# Altium PCB 06002480宁波2号线二期车载PIS系统_功率放大器音频板2 BHC-A-2030-05_PCB V1.0.PcbDoc (part 5 of 6)
Units mil, origin at the board's own origin, x right, y up, seen from the top; angles counter-clockwise.
Board outline 3385.83 x 3779.53 mil, 4 copper layers (Top Layer, GND, VDD, Bottom Layer); 210 components, 185 nets, 792 pads, 313 vias.
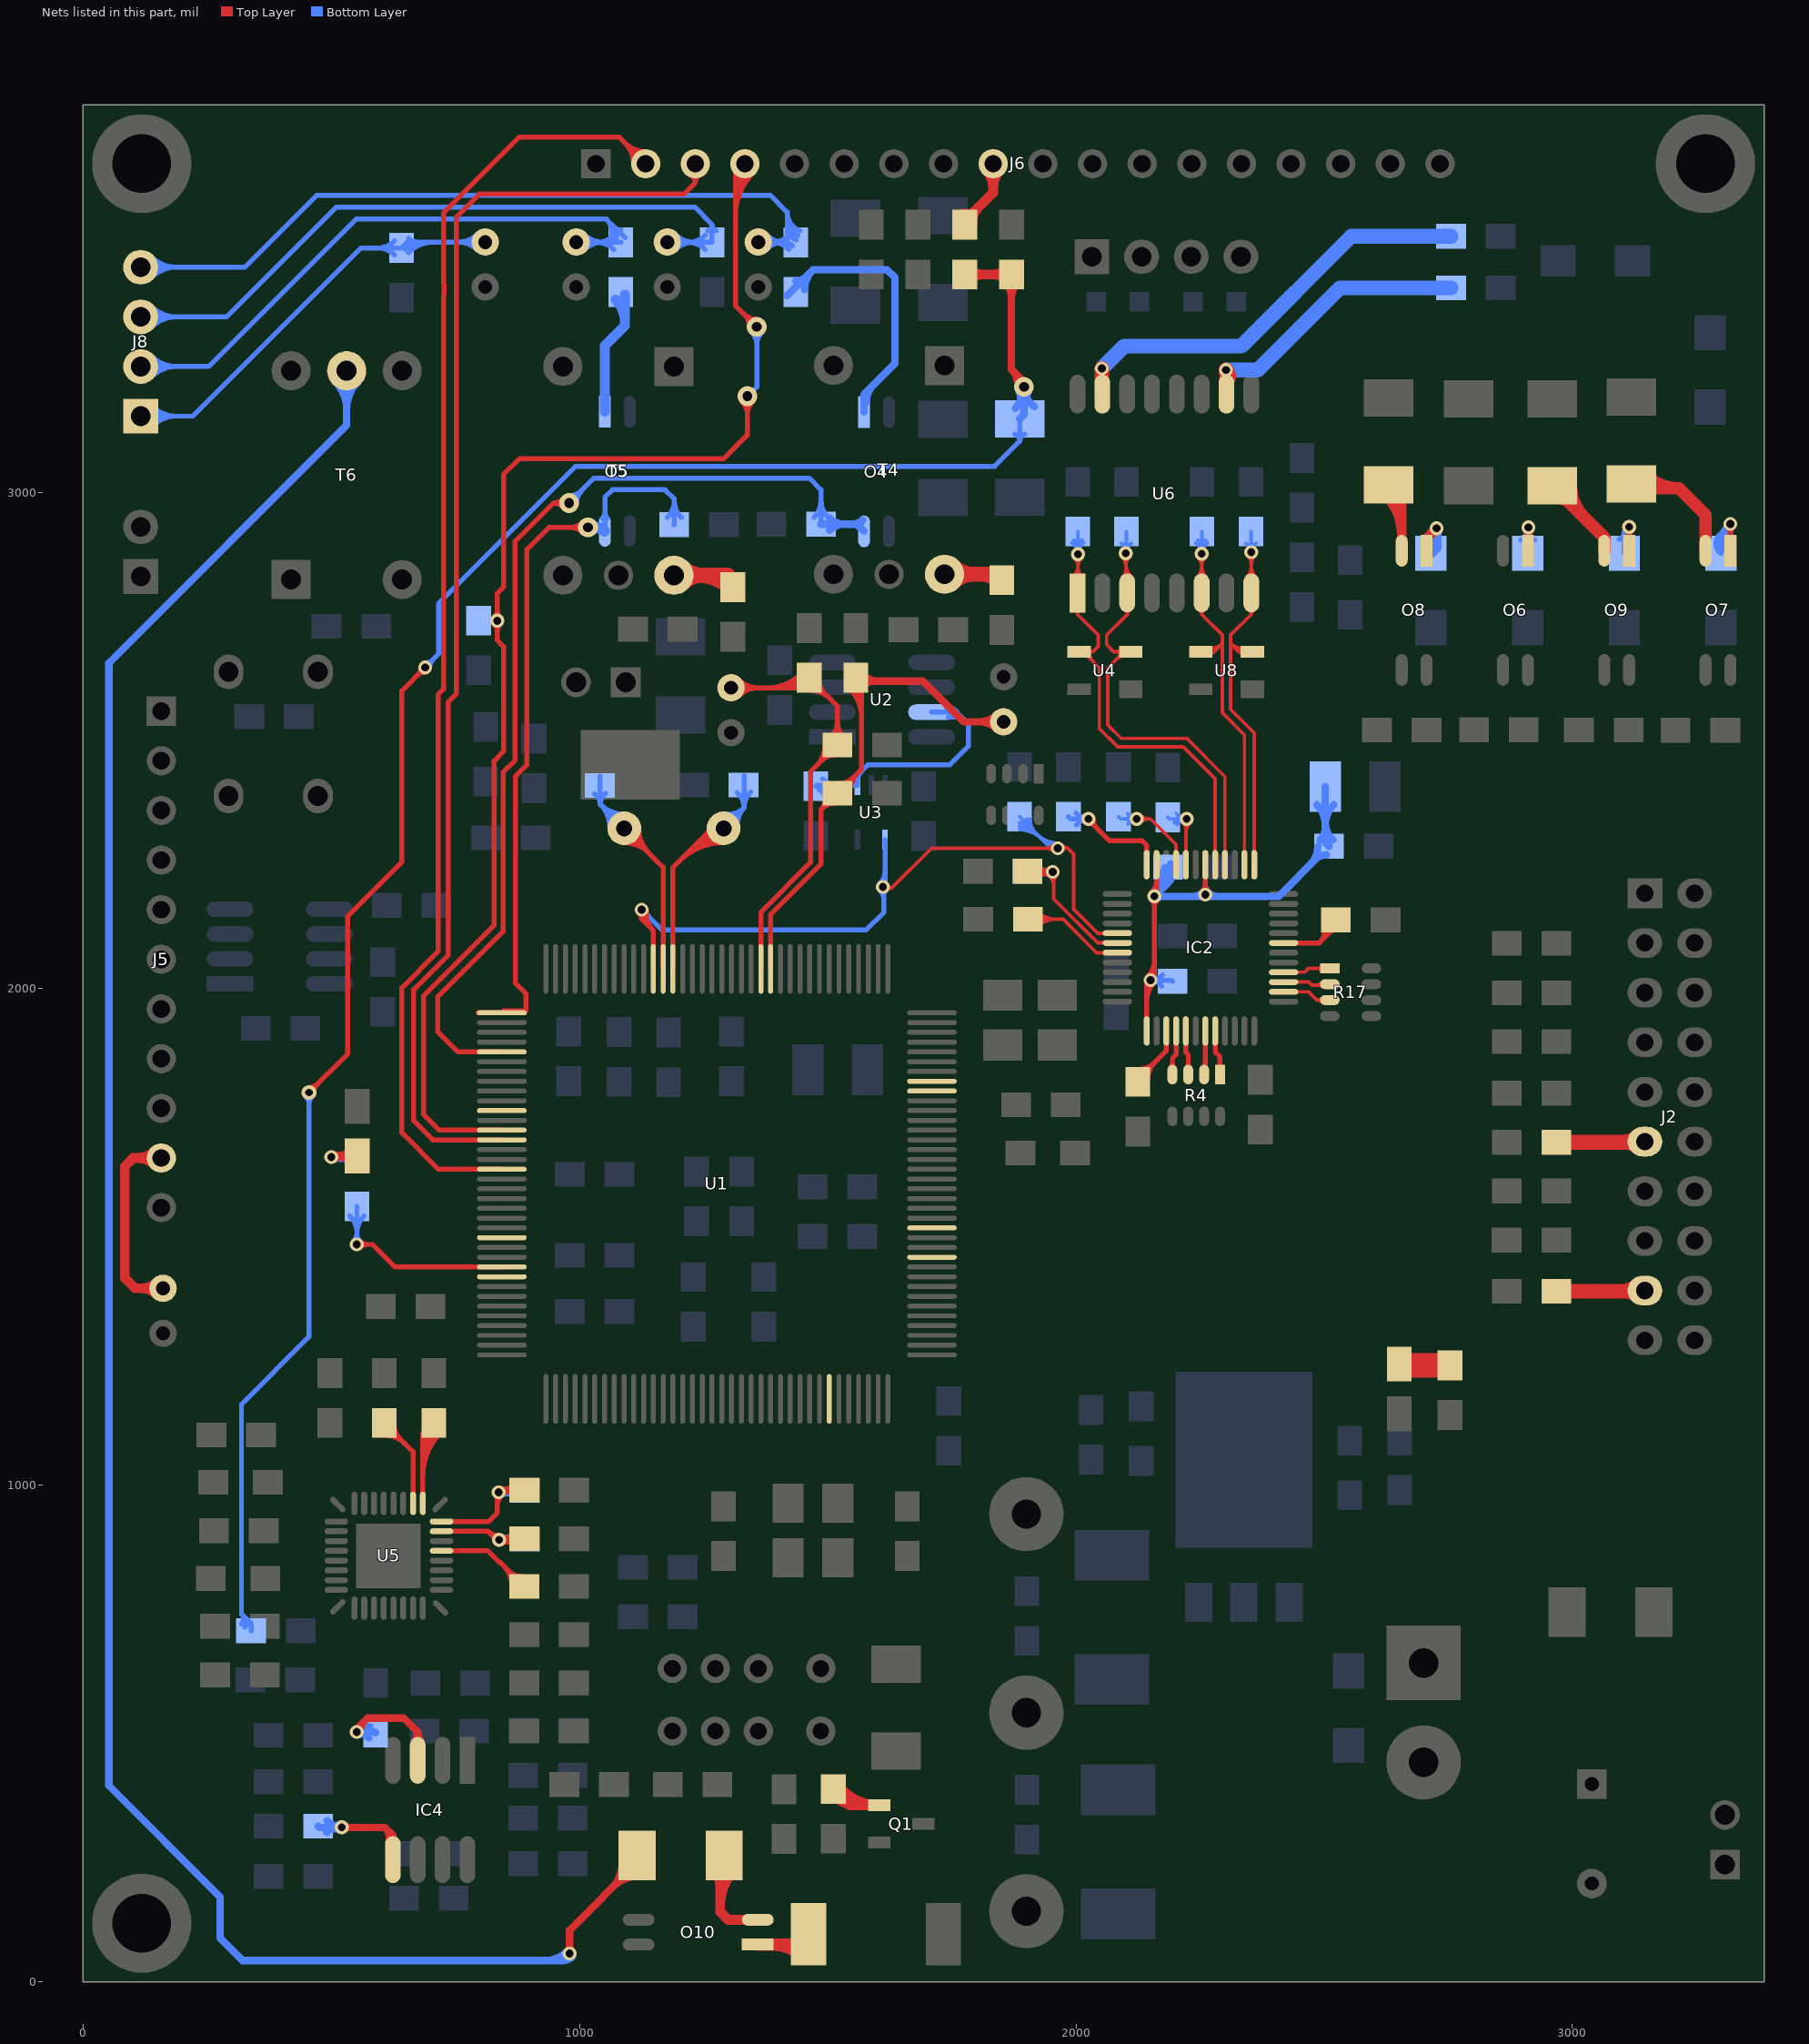
[diagram p7: the nets of this part, all layers, seen from the top]

## Via types
v1: diameter 28, hole 16, Top Layer to Bottom Layer, 240 vias
v2: diameter 30, hole 15, Top Layer to Bottom Layer, 25 vias
v3: diameter 35, hole 15, Top Layer to Bottom Layer, 16 vias
v4: diameter 30, hole 18, Top Layer to Bottom Layer, 10 vias
v5: diameter 40, hole 20, Top Layer to Bottom Layer, 9 vias
v6: diameter 50, hole 25, Top Layer to Bottom Layer, 7 vias
v7: diameter 50, hole 28, Top Layer to Bottom Layer, 5 vias
v8: diameter 36, hole 20, Top Layer to Bottom Layer, 1 vias

## Nets (pads, with @x,y where several pads share a name; then routed paths per layer and width w, separated by ;. In a path a pad name is that pad's centre, name@x,y a point inside that pad or via, vN(x,y) a via of type N, cw(c..) or ccw(c..) an arc to the next point about the centre after c; other vN are vias at no path point) (continued)
NetD15_A: D15.A O7.2 | length 342.3
  Top Layer w25: D15.A@3118.5,3016.75 3127.5,3007.75 3214.25,3007.75 3268,2954 O7.2@3268,2882 ; D15.A@3148.68,2999.07 cw(c3169.63,2978.12) 3169.63,3007.75 ; D15.A@3148.68,3034.43 ccw(c3213.09,3098.84) 3213.09,3007.75
NetD16_A: D16.A O8.2 | length 285.2
  Top Layer w20: D16.A@2622.56,2995.31 cw(c2541.82,2914.57) 2656,2914.57 ; D16.A@2629.5,3014.75 2656,2988.26 O8.2@2656,2882 ; D16.A@2636.7,3009.45 cw(c2590.11,2962.86) 2656,2962.86
NetD17_A: D17.A O9.2 | length 268.8
  Top Layer w25: D17.A@2959.5,3012.75 3064,2908.26 O9.2@3064,2882 ; D17.A@2972,2987.75 cw(c2972,2957.57) D17.A@2993.34,2978.91 ; D17.A@2997,3012.75 ccw(c3087.54,3012.75) 3023.52,2948.74
NetD19_A: D19.A O10.2 | length 340.2
  Top Layer w20: D19.A@1271.8,222.56 cw(c1244.77,195.53) 1283,195.53 ; 1283,155.7 cw(c1377.55,155.7) D19.A@1310.69,222.56 ; 1283,203.99 cw(c1329.27,203.99) D19.A@1296.55,236.7 ; D19.A@1291.25,254.5 1283,246.26 1283,141 1299,125 O10.2@1359,125
NetD19_K: D19.K T6.4 | length 4856.3
  Top Layer w15: v1@975.4,61.6 ccw(c964.31,72.69) 980,72.69 ccw(c995.69,72.69) v1@984.6,61.6 ; v1(980,57) 980,104 1116.25,240.25 D19.K@1116.25,254.5 ; 1063.79,187.79 ccw(c1009.58,242) D19.K@1086.25,242 ; 1068.03,192.03 cw(c1116.25,143.82) D19.K@1116.25,212 ; D19.K@1089.4,213.4 ccw(c1060.8,242) D19.K@1101.25,242
  Bottom Layer w15: T6.4@508.28,3221.94 cw(c453.87,3167.53) 530.81,3167.53 cw(c607.75,3167.53) T6.4@553.35,3221.94 ; T6.4@518.88,3232.54 cw(c490.08,3203.74) 530.81,3203.74 cw(c571.54,3203.74) T6.4@542.74,3232.54 ; T6.4@530.81,3244.47 530.81,3134.81 52,2656 52,395 276,171 276,88 321,43 966,43 v1(980,57) ; 930.51,43 ccw(c930.51,106.49) v1@975.4,61.6 ; 966.72,43 ccw(c966.72,70.28) v1@986.01,50.99
NetIC2_2: IC2.2 R17.3 | length 124.6
  Top Layer w7: IC2.2@2418,1993.68 2468.52,1993.68 2485.2,1977 R17.3@2511,1977 ; R17.3@2496.72,1972.4 ccw(c2485.62,1961.31) 2485.62,1977 ccw(c2485.62,1992.69) R17.3@2496.72,1981.6
NetIC2_3: IC2.3 R17.2 | length 121.1
  Top Layer w7: IC2.3@2418,2013.37 2468.63,2013.37 2475,2007 2509,2007 R17.2@2511,2009 ; 2480.79,2007 ccw(c2480.79,2029.52) R17.2@2496.72,2013.6 ; 2490.45,2007 cw(c2490.45,1998.14) R17.2@2496.72,2004.4
NetIC2_4: IC2.4 R17.1 | length 120.9
  Top Layer w7: IC2.4@2418,2033.05 2460.05,2033.05 2468,2041 R17.1@2511,2041 ; R17.1@2496.72,2036.4 ccw(c2485.62,2025.31) 2485.62,2041 ccw(c2485.62,2056.69) R17.1@2496.72,2045.6
NetIC2_7: IC2.7 R21.1 | length 213.4
  Top Layer w10: IC2.7@2418,2092.11 2490.11,2092.11 ; R21.1@2499.4,2132.16 cw(c2462.64,2119.58) 2490.11,2092.11 ; 2501.45,2103.45 ccw(c2479.54,2125.37) R21.1@2508.86,2135.39 ; R21.1@2513,2146 2513,2115 2490.11,2092.11
NetIC2_20: IC2.20 R34.1 | length 289.8
  Top Layer w7: v1@2215.58,2334.58 cw(c2202.12,2321.12) 2221.15,2321.12 ; IC2.20@2221.15,2249.59 2221.15,2340.15 v1(2223,2342) ; 2221.15,2312.18 cw(c2252.82,2312.18) v1@2230.42,2334.58
  Bottom Layer w7: R34.1@2184.63,2345.32 2187.95,2342 v1(2223,2342) ; R34.1@2197.46,2333.58 cw(c2211.41,2326.25) v1@2211.41,2342 ; R34.1@2202.17,2352.76 ccw(c2223,2367.54) v1(2223,2342) ; R34.1@2203.66,2330.32 cw(c2223,2320.15) v1(2223,2342) ; v1@2213,2338.81 ccw(c2209.5,2337.69) 2208.55,2341.23 ccw(c2206.84,2347.62) v1@2213.08,2345.45 ; v1@2215.58,2334.58 ccw(c2197.65,2316.65) 2197.65,2342 ccw(c2197.65,2367.35) v1@2215.58,2349.42
NetIC2_21: IC2.21 R36.1 | length 302.3
  Top Layer w7: v1(2122,2342) 2150,2342 2201.47,2290.54 IC2.21@2201.47,2249.59 ; v1@2129.42,2334.58 cw(c2147.35,2316.65) 2147.35,2342 cw(c2147.35,2367.35) v1@2129.42,2349.42
  Bottom Layer w7: R36.1@2085.63,2346.32 2089.95,2342 v1(2122,2342) ; R36.1@2104.17,2352.21 ccw(c2122,2362.67) v1(2122,2342) ; R36.1@2104.74,2331.48 cw(c2122,2322.59) v1(2122,2342) ; v1@2114.58,2334.58 ccw(c2096.65,2316.65) 2096.65,2342 ccw(c2096.65,2367.35) v1@2114.58,2349.42
NetIC2_24: IC2.24 R35.1 | length 386.2
  Top Layer w10: v1@2025,2333 cw(c2025,2316.1) 2036.95,2328.05 ; v1(2025,2342) 2025,2340 2067,2298 2133,2298 2142.41,2288.59 IC2.24@2142.41,2249.59 ; v1@2034,2342 ccw(c2060.56,2342) 2041.78,2323.22
  Bottom Layer w10: R35.1@1984.63,2346.32 1988.95,2342 v1(2025,2342) ; R35.1@2000.21,2353.87 ccw(c2025,2373.83) v1(2025,2342) ; R35.1@2000.86,2329.64 cw(c2025,2312.25) v1(2025,2342) ; v1@2016.28,2344.24 cw(c2007.88,2346.39) 2010.13,2338.02 cw(c2012.37,2329.64) v1@2018.57,2335.7 ; v1@2016.43,2339.26 ccw(c2006.35,2336.04) 2009.09,2346.26 ccw(c2011.82,2356.48) v1@2018.94,2348.66 ; v1@2018.64,2335.64 ccw(c2003.27,2320.27) 2003.27,2342 ccw(c2003.27,2363.73) v1@2018.64,2348.36
NetIC2_30: IC2.30 R18.2 R22.1 | length 813
  Top Layer w7: R22.1@1903.32,2235.63 1903.95,2235 v1(1953,2235) ; R22.1@1918.03,2226.59 cw(c1937.12,2209.14) 1937.12,2235 ; R22.1@1918.93,2245.06 ccw(c1939.02,2260.08) v1@1939.02,2235 ; R22.1@1923.19,2221.86 cw(c1953,2194.62) v1(1953,2235) ; R22.1@1924.54,2249.25 ccw(c1953,2270.54) v1(1953,2235) ; 1932.53,2236.74 ccw(c1935.39,2247.4) v1@1944.42,2241.05 ; 1936.02,2235.8 cw(c1932.65,2223.25) v1@1943.91,2229.75 ; v1@1942.89,2232.18 ccw(c1932.41,2229.26) 1935.23,2239.76 ccw(c1938.04,2250.26) v1@1945.65,2242.5 ; v1@1943.24,2238.88 cw(c1928.78,2244.62) 1932.81,2229.59 cw(c1936.83,2214.56) v1@1946.49,2226.76 ; v1@1945.58,2242.42 cw(c1927.65,2260.35) 1927.65,2235 cw(c1927.65,2209.65) 1945.58,2227.58 cw(c1922.82,2204.82) 1955,2204.82 ; 1955,2214.48 cw(c1973.52,2214.48) v1@1960.42,2227.58 ; IC2.30@2083.36,2092.11 2043.69,2092.11 1955,2180.8 1955,2233 v1(1953,2235)
  Bottom Layer w7: R18.2@1902.68,2235.63 1903.31,2235 v1(1953,2235) ; R18.2@1918.03,2226.59 cw(c1937.12,2209.14) 1937.12,2235 ; R18.2@1918.93,2245.06 ccw(c1939.02,2260.08) v1@1939.02,2235 ; R18.2@1923.19,2221.86 cw(c1953,2194.62) v1(1953,2235) ; R18.2@1924.54,2249.25 ccw(c1953,2270.54) v1(1953,2235) ; 1932.53,2236.74 ccw(c1935.39,2247.4) v1@1944.42,2241.05 ; 1936.02,2235.8 cw(c1932.65,2223.25) v1@1943.91,2229.75 ; v1@1942.89,2232.18 ccw(c1932.41,2229.26) 1935.23,2239.76 ccw(c1938.04,2250.26) v1@1945.65,2242.5 ; v1@1943.24,2238.88 cw(c1928.78,2244.62) 1932.81,2229.59 cw(c1936.83,2214.56) v1@1946.49,2226.76 ; v1@1945.58,2227.58 ccw(c1927.65,2209.65) 1927.65,2235 ccw(c1927.65,2260.35) v1@1945.58,2242.42
NetIC2_31: IC2.31 R20.1 | length 344.9
  Top Layer w7: R20.1@1903,2140 1974,2140 2041.58,2072.43 IC2.31@2083.36,2072.43 ; R20.1@1918.25,2129.75 cw(c1943.01,2104.99) 1943.01,2140 cw(c1943.01,2175.01) R20.1@1918.25,2150.25 ; R20.1@1923.2,2124.8 cw(c1959.91,2088.09) 1959.91,2140 cw(c1959.91,2191.91) R20.1@1923.2,2155.2
NetIC2_39: IC2.39 R8.2 | length 197.2
  Top Layer w10: R8.2@2124.37,1817.37 2181.78,1874.78 IC2.39@2181.78,1914.95 ; R8.2@2124.37,1837.32 ccw(c2124.37,1885.5) 2158.43,1851.43 ; R8.2@2144.37,1817.32 cw(c2192.77,1817.32) 2158.54,1851.54
NetIC2_40: IC2.40 R4.4 | length 110
  Top Layer w10: R4.4@2190.46,1840.22 ccw(c2181.93,1848.76) 2194,1848.76 ccw(c2206.07,1848.76) R4.4@2197.54,1840.22 ; R4.4@2194,1827 2194,1860 2201.47,1867.47 IC2.40@2201.47,1914.95
NetIC2_41: IC2.41 R4.3 | length 108.9
  Top Layer w10: IC2.41@2221.15,1914.95 2221.15,1871.85 2226,1867 R4.3@2226,1827 ; R4.3@2222.46,1840.22 ccw(c2213.93,1848.76) 2226,1848.76 ccw(c2238.07,1848.76) R4.3@2229.54,1840.22
NetIC2_43: IC2.43 R4.2 | length 105.2
  Top Layer w10: R4.2@2254.46,1840.22 ccw(c2239.85,1854.84) 2260.52,1854.84 ; R4.2@2258,1827 2260.52,1829.52 IC2.43@2260.52,1914.95
NetIC2_44: IC2.44 R4.1 | length 111
  Top Layer w10: IC2.44@2280.21,1914.95 2280.21,1872.8 2290,1863 R4.1@2290,1827 ; R4.1@2286.46,1840.22 ccw(c2277.93,1848.76) 2290,1848.76 ccw(c2302.07,1848.76) R4.1@2293.54,1840.22
NetIC4_3: IC4.3 R76.2 | length 454.6
  Top Layer w15: v1(551,503) 551,509 573,531 646,531 674,503 674,494 ; v1@557.5,503 cw(c587.68,503) 566.34,524.34 ; IC4.3@668.17,483.33 ccw(c654.09,497.41) 674,497.41 ccw(c693.91,497.41) IC4.3@679.83,483.33 ; IC4.3@669.05,484.09 ccw(c661.61,494) 674,494 ; IC4.3@678.95,484.09 cw(c686.39,494) 674,494
  Top Layer w20: IC4.3@674,446 674,494
  Bottom Layer w15: v1@554.25,497.37 cw(c562.1,483.78) 566.16,498.94 cw(c570.22,514.1) v1@556.63,506.25 ; v1@554.25,508.63 ccw(c562.1,522.22) 566.16,507.06 ccw(c570.22,491.9) v1@556.63,499.75 ; v1@555.6,498.4 cw(c566.69,487.31) 566.69,503 cw(c566.69,518.69) v1@555.6,507.6 ; R76.2@575.53,490.97 ccw(c551,471.99) v1(551,503) ; R76.2@576.84,513.89 cw(c551,539.09) v1(551,503) ; R76.2@589.37,501.68 588.05,503 v1(551,503)
NetIC4_5: IC4.5 R105.2 | length 417.3
  Top Layer w15: v1(521,311) 608,311 ; v1@525.6,306.4 cw(c536.69,295.31) 536.69,311 cw(c536.69,326.69) v1@525.6,315.6 ; IC4.5@616.07,279.77 ccw(c585.54,288.54) 608,311 ; IC4.5@618.75,283.86 ccw(c609.55,295) 624,295 ; IC4.5@624,246 624,295 ; IC4.5@629.25,283.86 cw(c638.45,295) 624,295 ; 608,311 624,295
  Bottom Layer w15: R105.2@473.32,313.37 475.69,311 v1(521,311) cw(c521,349.26) R105.2@491.72,324.63 ; R105.2@490.7,301 cw(c514.85,276.84) v1@514.85,311 ; R105.2@501.72,307.48 cw(c507.19,287.08) v1@517.75,305.37 ; v1@515.37,307.75 ccw(c501.78,299.9) 505.84,315.06 ccw(c509.9,330.22) v1@517.75,316.63 ; v1@516.4,306.4 ccw(c505.31,295.31) 505.31,311 ccw(c505.31,326.69) v1@516.4,315.6
NetJ2_11: J2.11 R30.2 | length 235.7
  Top Layer w30: R30.2@2967.68,1690.77 3144.77,1690.77 J2.11@3146,1692 ; 3101.82,1690.77 ccw(c3101.82,1731.18) J2.11@3130.39,1702.61 ; 3107.76,1690.77 cw(c3107.76,1658.76) J2.11@3130.39,1681.39
NetJ2_17: J2.17 R31.2 | length 235.9
  Top Layer w20: R31.2@2967.68,1390.63 R31.2@2969.05,1392
  Top Layer w30: R31.2@2967.68,1390.77 J2.17@3144.77,1390.77 ; 3101.82,1390.77 ccw(c3101.82,1431.18) J2.17@3130.39,1402.61 ; 3107.76,1390.77 cw(c3107.76,1358.76) J2.17@3130.39,1381.39
NetLED1_2: LED1.2 R59.2 | length 331.5
  Top Layer w15: v1(500,1661) 550,1661 LED1.2@552,1663 ; v1@503.25,1666.63 ccw(c513.27,1683.99) 518.46,1664.63 ; v1@504.6,1656.4 cw(c515.69,1645.31) 515.69,1661 cw(c515.69,1676.69) v1@504.6,1665.6 ; v1@504.92,1661 ccw(c504.92,1710.08) LED1.2@539.63,1675.37 ; 514.58,1661 cw(c514.58,1625.58) LED1.2@539.63,1650.63
  Bottom Layer w15: v1(500,1661) 500,1662 550.95,1662 R59.2@551.63,1661.32 ; v1@503.25,1655.37 cw(c516.17,1632.99) 522.86,1657.95 ; v1@503.25,1666.63 ccw(c514.31,1685.79) 520.04,1664.42 ; v1@504.6,1656.4 cw(c518.11,1642.89) 518.11,1662 ; v1@507.75,1662 cw(c507.75,1617.44) R59.2@539.26,1648.95 ; v1@511.01,1662 ccw(c511.01,1701.94) R59.2@539.26,1673.7
NetLED2_2: LED2.2 R1.2 | length 103.5
  Top Layer w50: LED2.2@2651,1244 2653.68,1241.32 R1.2@2753.37,1241.32
NetO4_1: O4.1 R11.1 | length 646.9
  Bottom Layer w15: R11.1@1418.23,3395.77 1470.46,3448 1619,3448 1635,3432 1635,3259 1573,3197 O4.1@1573,3161 ; R11.1@1435.63,3425.5 ccw(c1435.63,3455.28) 1456.69,3434.22 ; R11.1@1453.13,3408 cw(c1507.85,3408) 1469.16,3446.69 ; O4.1@1577.5,3181 cw(c1626.99,3181) 1592,3216
NetO5_1: O5.1 R33.1 | length 302.9
  Bottom Layer w20: O5.1@1051,3162 1051,3295 1091.23,3335.23 R33.1@1091.23,3397.77 ; R33.1@1072.39,3387.39 cw(c1026.91,3341.91) 1091.23,3341.91
NetO6_1: O6.1 R57.1 | length 294.5
  Top Layer w10: v1@2904.64,2922.64 cw(c2889.27,2907.27) 2911,2907.27 cw(c2932.73,2907.27) v1@2917.36,2922.64 ; O6.1@2905.05,2906.95 ccw(c2890.69,2921.31) v1@2911,2921.31 ; v1@2906.41,2921.26 cw(c2903.32,2916.05) 2909.17,2914.49 cw(c2918.33,2912.03) v1@2914.57,2920.74 ; O6.1@2910,2882 2911,2883 v1(2911,2929) ; v1@2911,2916.49 ccw(c2924.49,2916.49) O6.1@2914.95,2906.95
  Bottom Layer w10: R57.1@2895.98,2903.43 ccw(c2881.36,2927.66) v1@2909.67,2927.66 ; v1@2903.49,2924.04 cw(c2891.01,2915.81) 2905.45,2911.94 cw(c2917.16,2908.8) v1@2913.62,2920.39 ; v1@2904.64,2922.64 cw(c2892.49,2910.49) R57.1@2909.67,2910.49 ; R57.1@2909.67,2876.8 v1@2909.67,2927.67 ; R57.1@2909.67,2904.05 cw(c2935.95,2904.05) v1@2917.36,2922.64 ; v1(2911,2929) v1@2909.67,2927.67 ; R57.1@2923.35,2903.43 cw(c2937.97,2927.66) v1@2909.67,2927.66
NetO7_1: O7.1 R58.1 | length 437.4
  Top Layer w10: v1@3311.64,2929.64 cw(c3296.27,2914.27) 3318,2914.27 cw(c3339.73,2914.27) v1@3324.36,2929.64 ; O7.1@3313.05,2906.95 ccw(c3301.1,2918.9) 3318,2918.9 ccw(c3334.9,2918.9) O7.1@3322.95,2906.95 ; O7.1@3318,2882 v1(3318,2936)
  Bottom Layer w10: R58.1@3290.95,2905.98 ccw(c3287.44,2917) 3299,2917 ; R58.1@3296.5,2878.28 cw(c3314.88,2896.39) 3296.63,2914.63 ; R58.1@3299,2876.8 3299,2917 ; 3303.41,2915.95 cw(c3323.33,2904.44) v1@3319.5,2927.13 ; R58.1@3303.63,2885.3 cw(c3322.05,2903.46) 3303.76,2921.76 ; R58.1@3307.05,2905.98 cw(c3310.56,2917) 3299,2917 ; 3308.03,2923.94 ccw(c3296.92,2930.35) v1@3309.31,2933.67 ; v1@3309,2936 cw(c3287.27,2936) 3302.64,2920.64 cw(c3318,2905.27) v1@3318,2927 ; R58.1@3310.75,2892.32 cw(c3329.22,2910.53) v1@3310.88,2928.88 ; R58.1@3317.87,2899.34 cw(c3336.39,2917.6) v1(3318,2936) 3299,2917
NetO8_1: O8.1 R63.1 | length 195.4
  Top Layer w20: O8.1@2706,2882 2706,2907 v1(2726,2927) ; O8.1@2708,2902 cw(c2724.9,2902) O8.1@2712.95,2913.95 ; O8.1@2711.27,2911.04 cw(c2733.76,2898.06) v1@2727.04,2923.14 ; O8.1@2711.57,2911.56 cw(c2732.81,2899.3) v1@2726.96,2923.12
  Bottom Layer w20: R63.1@2707.71,2900.96 ccw(c2698.32,2927) v1(2726,2927) 2726,2887.8 R63.1@2715,2876.8
NetO9_1: O9.1 R64.1 | length 305.2
  Top Layer w10: v1@3107.64,2923.64 cw(c3092.27,2908.27) 3114,2908.27 cw(c3135.73,2908.27) v1@3120.36,2923.64 ; O9.1@3109.05,2906.95 ccw(c3097.1,2918.9) 3114,2918.9 ccw(c3130.9,2918.9) O9.1@3118.95,2906.95 ; v1@3109.61,2922.14 cw(c3104.15,2912.36) 3114.98,2915.26 cw(c3120.56,2916.75) v1@3117.99,2921.94 ; v1@3110.01,2921.94 cw(c3107.44,2916.75) 3113.02,2915.26 cw(c3123.85,2912.36) v1@3118.39,2922.14 ; O9.1@3114,2882 v1(3114,2930)
  Bottom Layer w10: R64.1@3094.23,2905.23 ccw(c3088,2920.33) v1@3104.33,2920.33 ; R64.1@3104.33,2876.8 v1@3104.33,2920.33 ; R64.1@3104.33,2884.93 cw(c3159.07,2884.93) v1@3120.36,2923.64 ; R64.1@3104.33,2909.08 cw(c3134.92,2909.08) v1@3113.29,2930.71 ; v1(3114,2930) v1@3104.33,2920.33 ; R64.1@3114.44,2905.23 cw(c3120.67,2920.33) v1@3104.33,2920.33
NetO10_1: O10.1 R98.1 | length 197.8
  Top Layer w25: O10.1@1359,75 1440.17,75 R98.1@1461.17,96 ; O10.1@1389.97,75 cw(c1389.97,-2.76) R98.1@1444.96,52.22 ; 1421.64,75 ccw(c1421.64,107.97) R98.1@1444.96,84.66
NetQ1_1: Q1.1 R6.2 | length 313.4
  Top Layer w20: R6.2@1507.55,380.1 ccw(c1560.68,424.9) 1560.68,355.4 ; R6.2@1511.37,388.32 1544.29,355.4 ; R6.2@1511.79,368.33 cw(c1513.04,324.15) 1544.29,355.4 ; R6.2@1522.84,392.99 ccw(c1603.71,461.18) Q1.1@1603.71,355.4 1544.29,355.4 ; R6.2@1526.37,383.32 ccw(c1550.51,383.32) R6.2@1533.44,366.25
NetR5_1: R5.1 T4.3 | length 250.3
  Top Layer w30: T4.3@1735,2834.53 1838.78,2834.53 R5.1@1850.63,2822.68 ; T4.3@1752.23,2817.3 cw(c1793.83,2775.69) 1793.83,2834.53 cw(c1793.83,2893.36) T4.3@1752.23,2851.76 ; 1809.95,2834.53 cw(c1809.95,2786.99) R5.1@1843.56,2820.61
NetR23_1: R23.1 T5.3 | length 280.4
  Top Layer w30: T5.3@1190,2832.53 1298.78,2832.53 R23.1@1305.63,2825.68 ; T5.3@1207.23,2815.3 cw(c1248.83,2773.69) 1248.83,2832.53 cw(c1248.83,2891.36) T5.3@1207.23,2849.76 ; 1238.98,2832.53 cw(c1238.98,2744.02) R23.1@1301.56,2806.61
NetR43_1: R43.1 U2.7 U3.1 | length 714.1
  Bottom Layer w10: R43.1@1476,2408 1478,2410 U3.1@1560,2410 1560,2430 1581,2451 1746,2451 1783,2488 1783,2534 ; R43.1@1483.07,2400.93 cw(c1504.97,2379.03) 1504.97,2410 ; R43.1@1490.14,2393.86 cw(c1529.11,2354.89) 1529.11,2410 ; R43.1@1490.14,2422.14 ccw(c1519.46,2451.46) 1519.46,2410 ; U3.1@1560.91,2424.09 cw(c1577.35,2424.09) 1565.72,2435.72 ; U2.7@1709,2557 1760,2557 ; U2.7@1738.76,2566.09 cw(c1742.44,2546.83) 1756.31,2560.69 ; U2.7@1740.64,2556.27 cw(c1746.73,2524.42) 1769.65,2547.35 ; U2.7@1742.52,2546.44 cw(c1751.02,2502.02) 1783,2534 ; U2.7@1749.58,2551.26 cw(c1760,2544.68) 1760,2557 ; U2.7@1749.58,2562.74 ccw(c1760,2569.32) 1760,2557 ; 1760,2557 1783,2534
NetR53_1: R53.1 U6.15 | length 865.6
  Top Layer w30: v1(2052,3249) 2052,3198.48 U6.15@2053,3197.48
  Bottom Layer w30: v1(2052,3249) 2097,3294 2333,3294 2554.37,3515.37 R53.1@2755.32,3515.37
NetR54_1: R54.1 U6.10 | length 597.7
  Top Layer w30: U6.10@2302.45,3221.61 ccw(c2289.57,3233.57) v1(2302,3246) 2303,3245 U6.10@2303,3197.48
  Bottom Layer w30: v1(2302,3246) 2366,3246 2531.37,3411.37 R54.1@2755.32,3411.37
NetR90_2: R90.2 U5.25 | length 448
  Top Layer w10: U5.25@684.37,963.57 684.37,1103.38 R90.2@706.63,1125.64 ; 684.37,1018.61 cw(c808.65,1018.61) R90.2@720.77,1106.5 ; 684.37,1042.76 cw(c784.51,1042.76) R90.2@713.7,1113.57 ; 684.37,1066.9 cw(c760.37,1066.9) R90.2@706.63,1120.64 ; 684.37,1091.04 cw(c736.23,1091.04) R90.2@699.56,1127.71
NetR91_2: R91.2 U5.26 | length 290.4
  Top Layer w10: R91.2@606.63,1100.64 cw(c606.63,1040.28) 649.31,1082.96 ; R91.2@606.63,1110.64 cw(c606.63,1074.42) 632.24,1100.03 ; R91.2@606.63,1125.64 664.69,1067.58 U5.26@664.69,963.57 ; R91.2@626.63,1120.64 ccw(c662.84,1120.64) 637.24,1095.03
NetR92_2: R92.2 R93.2 U5.23 | length 595.2
  Top Layer w10: U5.23@721.94,907.32 815.69,907.32 ; v1@837.5,898.99 cw(c835.9,927.53) 815.69,907.31 ; v1@841.11,890 cw(c841.11,849.81) R92.2@869.53,878.23 ; v1@842.8,882.39 cw(c854.29,864.19) R92.2@859.86,884.98 ; v1@843.08,897.43 ccw(c852.56,911.28) 856.91,895.07 ccw(c861.25,878.85) v1@846.12,886.11 ; v1@844.36,883.64 cw(c859.73,868.27) 859.73,890 cw(c859.73,911.73) v1@844.36,896.36 ; v1@845.79,894.5 ccw(c862.23,903.99) 857.32,885.66 ; 858.42,890 ccw(c858.42,911.97) R92.2@875.78,898.5 ; R92.2@867.88,904.63 cw(c838,927.81) v1(838,890) ; R92.2@888.68,892.37 886.31,890 v1(838,890) ; 815.69,907.32 834,889 837,889 v1(838,890)
  Bottom Layer w10: v1(838,890) v1@839.63,891.63 ; v1@842.5,897.79 ccw(c851.4,913.21) 856,896.02 ; v1@844.36,883.64 cw(c863.66,864.34) R93.2@863.66,891.63 ; v1@844.36,896.36 ccw(c855.79,907.79) 855.79,891.63 ; v1@844.44,883.72 cw(c853.41,874.97) 856.65,887.07 ; v1@845.79,885.5 cw(c868.02,872.67) R93.2@861.38,897.46 ; v1@845.79,894.5 ccw(c858.71,901.95) 854.85,887.55 ; R93.2@869.84,878.22 ccw(c839.63,850.91) v1@839.63,891.63 ; R93.2@869.84,905.04 cw(c839.63,932.35) v1@839.63,891.63 ; R93.2@889.68,891.63 v1@839.63,891.63
NetR94_2: R94.2 R95.2 U5.24 | length 584.8
  Top Layer w10: U5.24@721.94,927 817,927 834,944 834,983 v1(837,986) 841.37,990.37 R94.2@888.68,990.37 ; v1@830.64,979.64 cw(c822.51,971.51) 834,971.51 ; 834,957.03 cw(c865.97,957.03) 843.36,979.64 cw(c869.28,953.72) R94.2@869.28,990.37 ; v1@841.5,993.79 ccw(c847.09,1003.48) 849.98,992.68 ; R94.2@868.22,977.68 ccw(c841.37,955.63) 841.37,990.37 ccw(c841.37,1025.11) R94.2@868.22,1003.06
  Bottom Layer w10: v1@841.78,993.63 ccw(c851.98,1009.9) 856.95,991.35 ccw(c861.93,972.79) v1@844.95,981.79 ; v1@842.41,978.81 cw(c854.41,962.87) 859.57,982.14 ; v1@843.36,979.64 cw(c858.73,964.27) 858.73,986 cw(c858.73,1007.73) v1@843.36,992.36 ; v1@844.79,990.5 ccw(c857.37,997.76) 853.61,983.73 ; v1@845.16,986 cw(c845.16,950.11) R95.2@870.53,975.49 ; 857.18,986 ccw(c857.18,1010.56) R95.2@876.72,995.69 ; R95.2@868.76,1001.74 cw(c837,1025.91) v1(837,986) 885.05,986 R95.2@888.68,989.63
NetR96_2: R96.2 U5.21 | length 300.7
  Top Layer w10: U5.21@721.94,867.95 815.06,867.95 839,844 840.92,844 R96.2@888.68,796.24 ; 846,838.92 cw(c803.32,796.24) R96.2@863.68,796.24 ; 858.07,826.85 ccw(c883.68,852.45) R96.2@883.68,816.24 ; 863.07,821.85 cw(c837.46,796.24) R96.2@873.68,796.24
NOISE1_CPU: O4.4 R10.2 U1.41 | length 2321.3
  Top Layer w10: U1.41@843.44,1872.68 755.32,1872.68 714,1914 714,1983 846,2115 846,2436 870,2460 870,2901 947,2978 ; v5@967.47,2968.4 ccw(c947,2951.37) 947,2978 ; v5@967.47,2987.6 cw(c947,3004.63) 947,2978 ; v5(979,2978) 947,2978
  Bottom Layer w10: v5(979,2978) 1029,3028 1463,3028 1486.32,3004.68 R10.2@1486.32,2935.37 ; v5@979,2993 ccw(c979,3029.21) 1004.61,3003.61 ccw(c1030.21,2978) v5@994,2978 ; R10.2@1472.18,2949.51 ccw(c1438.04,2983.65) 1486.32,2983.65 ccw(c1534.61,2983.65) R10.2@1500.47,2949.51
  Bottom Layer w15: R10.2@1486.32,2935.37 1558.63,2935.37 ; R10.2@1503.7,2923 cw(c1533.57,2893.12) 1533.57,2935.37 cw(c1533.57,2977.62) R10.2@1503.7,2947.74 ; 1548.54,2935.37 ccw(c1548.54,2965.46) O4.4@1569.82,2944.18 ; O4.4@1568.76,2942.51 cw(c1558.63,2946.13) 1558.63,2935.37 ; O4.4@1573,2921 1558.63,2935.37
NOISE1_CPU_ADC: C10.1 R7.1 R9.1 U1.13 | length 1477.7
  Top Layer w10: U1.13@1384.78,2040 1384.78,2149.74 1486.02,2250.98 1486.02,2360.33 ; 1488.72,2363.02 cw(c1514.32,2337.42) R9.1@1514.32,2373.63 ; R9.1@1494.74,2389.55 cw(c1463.34,2383.01) 1486.02,2360.33 ; R9.1@1499.11,2373.42 ccw(c1485,2387.52) R9.1@1504.53,2391.59 ; R9.1@1524.32,2413.63 ccw(c1524.32,2449.84) 1549.93,2424.24 ; R9.1@1534.32,2393.63 cw(c1570.54,2393.63) 1544.93,2419.24 ; R7.1@1542.23,2607.18 cw(c1480.01,2544.96) 1568,2544.96 ; R9.1@1544.32,2393.63 cw(c1604.68,2393.63) 1562,2436.31 ; R7.1@1549.3,2614.25 cw(c1504.15,2569.1) 1568,2569.1 ; R7.1@1556.37,2621.32 cw(c1528.29,2593.25) 1568,2593.25 ; R7.1@1556.37,2626.32 1563.37,2619.32 1568,2614.69 1568,2442.31 R9.1@1519.32,2393.63 1486.02,2360.33
  Top Layer w15: R7.1@1554.37,2619.32 1563.37,2619.32 1691.65,2619.32 1773.53,2537.45 C10.1@1854,2537.45 ; R7.1@1568.74,2608.95 cw(c1593.79,2583.9) 1593.79,2619.32 ; R7.1@1568.74,2633.7 ccw(c1603.45,2668.4) 1603.45,2619.32 ; C10.1@1839.82,2523.26 ccw(c1805.57,2489.02) 1805.57,2537.45 ccw(c1805.57,2585.88) C10.1@1839.82,2551.63
NOISE1A: C12.1 J8.1 R19.1 | length 1351.1
  Bottom Layer w10: J8.1@116,3153 221,3153 559.68,3491.68 R19.1@641.37,3491.68 653.25,3503.55 C12.1@810,3503.55 ; J8.1@130.14,3138.86 cw(c164.28,3104.72) 164.28,3153 cw(c164.28,3201.28) J8.1@130.14,3167.14 ; J8.1@137.21,3131.79 cw(c188.43,3080.57) 188.43,3153 cw(c188.43,3225.43) J8.1@137.21,3174.21 ; R19.1@627.23,3477.53 ccw(c593.09,3443.39) 593.09,3491.68 ccw(c593.09,3539.96) R19.1@627.23,3505.82 ; R19.1@648.44,3489.61 cw(c682.11,3455.94) 682.11,3503.55 ; R19.1@655.51,3482.53 cw(c706.25,3431.79) 706.25,3503.55 ; R19.1@655.51,3510.82 ccw(c673.06,3528.36) 673.06,3503.55 ; C12.1@794.05,3487.6 ccw(c755.54,3449.09) 755.54,3503.55 ccw(c755.54,3558.01) C12.1@794.05,3519.5 ; C12.1@801.12,3494.67 ccw(c779.68,3473.23) 779.68,3503.55 ccw(c779.68,3533.87) C12.1@801.12,3512.43
NOISE1B: C14.1 J8.2 R33.2 | length 1684.7
  Bottom Layer w10: J8.2@116,3253 253,3253 550,3550 1054,3550 ; J8.2@130.14,3238.86 cw(c164.28,3204.72) 164.28,3253 cw(c164.28,3301.28) J8.2@130.14,3267.14 ; J8.2@137.21,3231.79 cw(c188.43,3180.57) 188.43,3253 cw(c188.43,3325.43) J8.2@137.21,3274.21 ; C14.1@993.33,3503.55 993.88,3503 R33.2@1083,3503 ; C14.1@1002.21,3494.67 cw(c1022.32,3474.56) 1022.32,3503 ; C14.1@1002.21,3512.43 ccw(c1024.98,3535.2) 1024.98,3503 ; C14.1@1009.28,3487.6 cw(c1046.46,3450.42) 1046.46,3503 ; C14.1@1009.28,3519.5 ccw(c1049.13,3559.34) 1049.13,3503 ; R33.2@1063.71,3513.3 ccw(c1027.3,3523.3) 1054,3550 ; 1066.16,3537.84 cw(c1046.38,3518.06) R33.2@1073.36,3510.65 ; R33.2@1068.86,3488.86 ccw(c1034.72,3454.72) 1034.72,3503 ccw(c1034.72,3551.28) R33.2@1068.86,3517.14 ; R33.2@1071.05,3532.95 ccw(c1083,3544.9) R33.2@1083,3528 ; R33.2@1091.23,3512.77 1054,3550
NOISE2_CPU: O5.4 R32.2 U1.37 | length 1742.1
  Top Layer w10: U1.37@795.58,1951.42 U1.37@843.44,1951.42 847.02,1955 892,1955 892,1990 871,2011 871,2428 894,2451 894,2885 938,2929 v5(1017,2929) ; U1.37@888.44,1951.42 ccw(c879.85,1960.01) 892,1960.01 ; v5@1006.39,2918.39 ccw(c980.79,2892.79) 980.79,2929 ccw(c980.79,2965.21) v5@1006.39,2939.61
  Bottom Layer w10: O5.4@1046.05,2946.95 ccw(c1034.1,2958.9) 1051,2958.9 ccw(c1067.9,2958.9) O5.4@1055.95,2946.95 ; O5.4@1051,2922 1051,2990 1066,3005 1172,3005 1190.68,2986.32 R32.2@1190.68,2934.63 ; R32.2@1176.53,2948.77 ccw(c1142.39,2982.91) 1190.68,2982.91 ccw(c1238.96,2982.91) R32.2@1204.82,2948.77
  Bottom Layer w20: v5(1017,2929) 1044,2929 O5.4@1051,2922 ; v5@1024.07,2921.93 cw(c1041.14,2904.86) 1041.14,2929 cw(c1041.14,2953.14) v5@1024.07,2936.07 ; v5@1024.51,2922.4 cw(c1034.78,2913.36) 1038.32,2926.58 ; v5@1029.27,2929 cw(c1029.27,2900.27) O5.4@1049.59,2920.59
NOISE2_CPU_ADC: C19.1 R24.1 R25.1 U1.14 | length 1906.8
  Top Layer w10: C19.1@1305,2606 1442.05,2606 R25.1@1462.37,2626.32 1519.32,2569.37 R24.1@1519.32,2490.63 1465,2436.31 1465,2254 1365.09,2154.09 U1.14@1365.09,2040 ; C19.1@1315,2605.55 1446.6,2605.55 R25.1@1461.37,2620.32 ; 1334.24,2605.55 ccw(c1334.24,2576.76) 1313.88,2597.12 cw(c1335.32,2575.68) 1335.32,2606 cw(c1335.32,2636.32) 1313.88,2614.88 ccw(c1336.4,2637.4) 1336.4,2605.55 ; 1358.38,2605.55 ccw(c1358.38,2552.62) 1320.95,2590.05 cw(c1359.46,2551.54) 1359.46,2606 cw(c1359.46,2660.46) 1320.95,2621.95 ccw(c1360.55,2661.55) 1360.55,2605.55 ; 1376.01,2605.55 ccw(c1376.01,2707.69) 1448.23,2635.47 cw(c1377.09,2706.6) 1377.09,2606 ; 1400.15,2605.55 ccw(c1400.15,2683.54) 1455.3,2628.39 cw(c1401.23,2682.46) 1401.23,2606 ; 1424.29,2605.55 ccw(c1424.29,2659.4) 1462.37,2621.32 cw(c1425.38,2658.32) 1425.38,2606 ; R25.1@1462.37,2601.32 cw(c1462.37,2540.97) 1505.05,2583.65 ; R25.1@1462.37,2611.32 cw(c1462.37,2575.11) 1487.98,2600.72 ; 1476.65,2447.95 ccw(c1433.97,2490.63) R24.1@1494.32,2490.63 ; R25.1@1482.37,2621.32 ccw(c1518.58,2621.32) 1492.98,2595.72 ; 1488.72,2460.02 cw(c1514.32,2434.42) R24.1@1514.32,2470.63 ; 1493.72,2465.02 ccw(c1468.11,2490.63) R24.1@1504.32,2490.63 ; R24.1@1505.18,2504.77 ccw(c1471.04,2538.91) 1519.32,2538.91 ccw(c1567.61,2538.91) R24.1@1533.47,2504.77
NOISE2A: C2.1 J8.3 R3.1 | length 1814.4
  Bottom Layer w10: J8.3@116,3353 289,3353 510,3574 1232,3574 1266.97,3539.03 ; J8.3@130.14,3338.86 cw(c164.28,3304.72) 164.28,3353 cw(c164.28,3401.28) J8.3@130.14,3367.14 ; J8.3@137.21,3331.79 cw(c188.43,3280.57) 188.43,3353 cw(c188.43,3425.43) J8.3@137.21,3374.21 ; C2.1@1176.67,3503.55 1177.22,3503 R3.1@1266.97,3503 1266.97,3539.03 ; C2.1@1185.55,3494.67 cw(c1205.65,3474.56) 1205.65,3503 ; C2.1@1185.55,3512.43 ccw(c1208.32,3535.2) 1208.32,3503 ; C2.1@1192.62,3487.6 cw(c1229.8,3450.42) 1229.8,3503 ; C2.1@1192.62,3519.5 ccw(c1232.46,3559.35) 1232.46,3503 ; R3.1@1252.83,3488.86 ccw(c1218.69,3454.71) 1218.69,3503 ccw(c1218.69,3551.28) R3.1@1252.83,3517.14 ; R3.1@1258.71,3526.21 ccw(c1252.9,3539.03) 1266.97,3539.03 ; R3.1@1275.23,3526.21 cw(c1281.04,3539.03) 1266.97,3539.03
NOISE2B: C6.1 J8.4 R11.2 | length 2046.8
  Bottom Layer w10: J8.4@116,3453 326,3453 471,3598 1384,3598 1418.23,3563.77 ; J8.4@130.14,3438.86 cw(c164.28,3404.72) 164.28,3453 cw(c164.28,3501.28) J8.4@130.14,3467.14 ; J8.4@137.21,3431.79 cw(c188.43,3380.57) 188.43,3453 cw(c188.43,3525.43) J8.4@137.21,3474.21 ; C6.1@1360,3503.55 1410.45,3503.55 ; C6.1@1369.36,3495.18 cw(c1388.08,3478.43) 1388.08,3503.55 cw(c1388.08,3528.67) C6.1@1369.36,3511.92 ; C6.1@1376.81,3488.51 cw(c1410.45,3458.43) 1410.45,3503.55 ; C6.1@1376.81,3518.59 ccw(c1410.45,3548.68) 1410.45,3503.55 ; C6.1@1386.02,3503.55 cw(c1386.02,3453.39) R11.2@1421.49,3488.86 ; 1388.68,3503.55 ccw(c1388.68,3549.95) R11.2@1421.49,3517.14 ; 1410.16,3503.55 cw(c1410.16,3477.53) R11.2@1428.56,3495.93 ; R11.2@1416.04,3498.99 ccw(c1410.45,3497.85) 1410.45,3503.55 ; R11.2@1416.28,3508.05 cw(c1410.45,3509.58) 1410.45,3503.55 ; 1418.23,3533.94 ccw(c1446.27,3533.94) R11.2@1435.63,3508 ; 1418.23,3548.85 ccw(c1452.39,3548.85) R11.2@1439.43,3517.25 ; R11.2@1443.22,3526.5 cw(c1458.51,3563.77) 1418.23,3563.77 ; 1410.45,3503.55 1418.23,3495.77 1418.23,3563.77
OSCIN: C27.1 U1.23 X1.2 | length 958.9
  Top Layer w10: U1.23@1187.93,2040 1187.93,2243.93 1267,2323 X1.2@1290,2323 ; 1201.23,2257.23 cw(c1290,2168.46) X1.2@1290,2294 ; 1218.3,2274.3 cw(c1290,2202.6) X1.2@1290,2304 ; 1235.37,2291.37 cw(c1290,2236.74) X1.2@1290,2314 ; 1252.44,2308.44 cw(c1290,2270.89) X1.2@1290,2324 ; 1256.76,2312.76 ccw(c1246.52,2323) X1.2@1261,2323
  Bottom Layer w10: X1.2@1290,2323 1331.36,2364.36 ; X1.2@1292.56,2341.83 ccw(c1296.49,2370.71) 1317.1,2350.1 ccw(c1337.71,2329.49) X1.2@1308.83,2325.56 ; X1.2@1293.91,2351.74 ccw(c1299.9,2395.81) 1331.36,2364.36 ; C27.1@1317.36,2394.76 cw(c1291.35,2364.35) 1331.36,2364.35 ; X1.2@1318.74,2326.91 cw(c1362.81,2332.9) 1331.36,2364.36 ; C27.1@1331.36,2428.95 1331.36,2364.36 ; C27.1@1344.44,2395.75 ccw(c1375.58,2364.35) 1331.36,2364.35
OSCOUT: C29.1 U1.24 X1.1 | length 848
  Top Layer w10: X1.1@1090,2294 cw(c1090,2223.99) 1139.51,2273.49 cw(c1189.01,2323) X1.1@1119,2323 ; X1.1@1090,2304 cw(c1090,2258.13) 1122.44,2290.56 cw(c1154.87,2323) X1.1@1109,2323 ; X1.1@1090,2323 1168.24,2244.76 U1.24@1168.24,2040
  Bottom Layer w10: C29.1@1030.11,2392.04 cw(c1017.3,2371.35) 1041.64,2371.35 ; C29.1@1041.64,2428.05 1041.64,2371.36 ; C29.1@1052.54,2392.97 ccw(c1068.53,2371.35) 1041.64,2371.35 ; X1.1@1061,2323.48 ccw(c994.87,2324.59) 1041.64,2371.36 ; X1.1@1071,2323.32 ccw(c1027.68,2324.04) 1058.32,2354.68 ccw(c1088.96,2385.32) X1.1@1089.68,2342 ; X1.1@1089.52,2352 cw(c1088.41,2418.13) 1041.64,2371.36 ; X1.1@1090,2323 1041.64,2371.36
OUT1: C64.2 J5.10 | length 531.7
  Top Layer w20: J5.10@143.67,1645.25 ccw(c110.34,1611.91) 110.34,1659.06 ccw(c110.34,1706.2) J5.10@143.67,1672.86 ; C64.2@148.58,1384.14 ccw(c118.61,1354.16) 118.61,1396.55 ccw(c118.61,1438.94) C64.2@148.58,1408.97 ; J5.10@157.48,1659.06 101.06,1659.06 84,1642 84,1417 104.45,1396.55 C64.2@161,1396.55
OVP_CPU: J6.3 U1.50 | length 2637.3
  Top Layer w10: U1.50@843.44,1695.51 704.49,1695.51 666,1734 666,1998 735,2067 735,2577 752,2594 752,3554 798,3600 1210,3600 1233.07,3623.07 ; J6.3@1222.79,3639.14 cw(c1215.37,3623.07) 1233.07,3623.07 ; J6.3@1233.07,3661.41 1233.07,3623.07 ; J6.3@1243.35,3639.14 ccw(c1250.77,3623.07) 1233.07,3623.07
PFB: C15.1 C16.2 C17.2 C18.2 IC2.18 IC2.23 IC2.37 | length 1853.7
  Top Layer w10: IC2.37@2142.41,1894.41 IC2.37@2142.41,1914.95 2142.41,2006.41 2158,2022 v1(2158,2186) 2162.09,2190.09 IC2.23@2162.09,2249.59 ; 2142.41,1976.95 cw(c2190.05,1976.95) v1@2156.36,2010.64 ; 2142.41,2001.09 cw(c2165.91,2001.09) v1@2149.29,2017.71 ; v1@2143.64,2023.36 ccw(c2108.96,2058.04) 2158,2058.04 ; v1@2150.71,2016.29 ccw(c2133.1,2033.9) 2158,2033.9 ; v1@2151.64,2179.64 cw(c2136.27,2164.27) 2158,2164.27 cw(c2179.73,2164.27) v1@2164.36,2179.64 ; v1@2151.64,2192.36 ccw(c2126.39,2217.61) 2162.1,2217.61 ; v1@2254.16,2195.88 ccw(c2238.79,2211.25) 2260.52,2211.25 ccw(c2282.25,2211.25) v1@2266.88,2195.88 ; v1(2260.52,2189.52) IC2.18@2260.52,2249.59
  Bottom Layer w7: v1(2158,2186) v1@2161.05,2189.05
  Bottom Layer w10: v1@2156,2023.7 ccw(c2163.25,2031.79) 2166.06,2021.3 ccw(c2168.87,2010.81) v1@2158.55,2014.2 ; v1@2156.36,2010.64 cw(c2171.73,1995.27) 2171.73,2017 cw(c2171.73,2038.73) v1@2156.36,2023.36 ; C18.2@2172.31,2004.51 ccw(c2150,1990.84) v1(2150,2017) ; C18.2@2174.26,2028.06 cw(c2150,2049.12) v1(2150,2017) ; C18.2@2194.36,2014.95 2192.31,2017 v1(2150,2017)
  Bottom Layer w15: v1@2156.32,2192.28 ccw(c2151.27,2211.12) 2168.16,2201.37 ; v1(2158,2186) 2408,2186 2488,2266 C17.2@2489,2266 ; v1@2158,2192.5 ccw(c2158,2208.19) 2169.1,2197.1 ccw(c2180.19,2186) v1@2164.5,2186 ; v1@2162.6,2181.4 cw(c2173.69,2170.31) 2173.69,2186 cw(c2173.69,2201.69) v1@2162.6,2190.6 ; C16.2@2165.75,2235.32 cw(c2135.03,2215.07) 2161.05,2189.05 2185.36,2213.36 ; 2174.05,2202.05 ccw(c2150.71,2225.4) C16.2@2178.27,2243.58 ; C16.2@2176.08,2230.12 cw(c2165.6,2213.36) 2185.36,2213.36 ; C16.2@2185.36,2244.95 2185.36,2213.36 ; 2187.06,2215.06 ccw(c2166.38,2235.74) C16.2@2190.8,2251.83 ; C16.2@2194.64,2230.12 ccw(c2205.12,2213.36) 2185.36,2213.36 ; 2236.33,2186 ccw(c2236.33,2213.71) v1@2255.92,2194.12 ; v1@2265.12,2194.12 ccw(c2284.71,2213.71) 2284.71,2186 ; 2471.24,2249.24 ccw(c2433.53,2286.95) C17.2@2486.86,2286.95 ; 2482.33,2260.33 cw(c2504.36,2238.29) C17.2@2504.36,2269.45 ; C15.1@2485.03,2370.35 cw(c2444.07,2329.38) 2502,2329.38 cw(c2559.93,2329.38) C15.1@2518.97,2370.35 ; C17.2@2491.99,2299.33 ccw(c2467.81,2323.5) 2502,2323.5 ; 2502,2334.9 ccw(c2552.31,2334.9) C17.2@2516.74,2299.33 ; C15.1@2502,2407 2502,2294.31 C17.2@2509.36,2286.95
RD_N: IC2.13 R47.2 U6.8 U8.2 | length 1041
  Top Layer w7: 2320.31,2686.19 ccw(c2337.22,2703.11) U8.2@2342.88,2679.86 ; 2329.11,2677.39 ccw(c2340.67,2688.94) U8.2@2344.53,2673.06 ; U8.2@2336.21,2674.08 ccw(c2327.91,2668.7) 2327.91,2678.59 ; U8.2@2336.21,2683.11 cw(c2327.91,2688.48) 2327.91,2678.59 ; U8.2@2341.22,2686.67 cw(c2333.78,2717.27) 2311.5,2695 ; U6.8@2344.34,2829.28 ccw(c2323.43,2850.19) 2353,2850.19 ccw(c2382.57,2850.19) U6.8@2361.66,2829.28 ; v1@2345.58,2871.58 cw(c2327.65,2853.65) 2353,2853.65 cw(c2378.35,2853.65) v1@2360.42,2871.58 ; U6.8@2347.64,2762.36 cw(c2343.47,2753.8) 2353,2753.8 ; v1(2353,2879) U6.8@2353,2797 2353,2753.8 ; U8.2@2355,2678.59 2327.91,2678.59 ; U6.8@2358.36,2762.36 ccw(c2362.53,2753.8) 2353,2753.8 ; IC2.13@2358.95,2249.59 2358.95,2515.06 2311.5,2562.5 2311.5,2695 ; 2311.5,2695 2311.5,2712.3 2353,2753.8 ; 2311.5,2695 2327.91,2678.59
  Bottom Layer w7: R47.2@2342.15,2896.76 cw(c2332.9,2879.63) v1@2352.37,2879.63 ; v1@2345.58,2886.42 ccw(c2329.17,2902.83) R47.2@2352.37,2902.83 ; R47.2@2352.37,2905.87 ccw(c2379.87,2905.87) v1@2360.42,2886.42 ; R47.2@2352.37,2920.68 v1@2352.37,2879.63 ; v1(2353,2879) v1@2352.37,2879.63 ; R47.2@2362.59,2896.76 ccw(c2371.84,2879.63) v1@2352.37,2879.63
RD_P: IC2.14 R46.2 U6.6 U8.3 | length 1114.4
  Top Layer w7: U6.6@2244.34,2829.28 ccw(c2223.43,2850.19) 2253,2850.19 ccw(c2282.57,2850.19) U6.6@2261.66,2829.28 ; v1@2245.58,2868.58 cw(c2227.65,2850.65) 2253,2850.65 cw(c2278.35,2850.65) v1@2260.42,2868.58 ; U6.6@2247.64,2762.36 cw(c2243.47,2753.8) 2253,2753.8 ; U8.3@2251.06,2678.59 2278.09,2678.59 ; v1(2253,2876) U6.6@2253,2797 2253,2753.8 ; U6.6@2258.36,2762.36 ccw(c2262.53,2753.8) 2253,2753.8 ; U8.3@2261.53,2673.06 ccw(c2265.37,2688.87) 2276.87,2677.37 ; U8.3@2263.18,2679.87 ccw(c2268.81,2703.06) 2285.68,2686.18 ; U8.3@2264.83,2686.67 ccw(c2272.25,2717.25) 2294.5,2695 ; U8.3@2269.87,2674.1 cw(c2278.09,2668.82) 2278.09,2678.59 ; U8.3@2269.87,2683.08 ccw(c2278.09,2688.36) 2278.09,2678.59 ; IC2.14@2339.26,2249.59 2339.26,2510.7 2294.5,2555.46 2294.5,2695 ; 2253,2753.8 2294.5,2712.3 2294.5,2695 ; 2278.09,2678.59 2294.5,2695
  Bottom Layer w7: R46.2@2241.77,2897.57 cw(c2228.19,2876.37) 2253.37,2876.37 cw(c2278.55,2876.37) R46.2@2264.97,2897.57 ; R46.2@2245.55,2903.47 cw(c2236.39,2889.17) 2253.37,2889.17 cw(c2270.35,2889.17) R46.2@2261.19,2903.47 ; v1@2245.58,2883.42 ccw(c2226.76,2902.24) R46.2@2253.37,2902.24 ; v1@2248.41,2885.44 ccw(c2243.55,2895.43) 2254.28,2892.55 ccw(c2260.17,2890.97) v1@2257.54,2885.47 ; v1@2249.85,2886.02 ccw(c2248.53,2890.22) 2252.78,2891.36 ccw(c2261.79,2893.77) v1@2257.66,2885.41 ; v1(2253,2876) 2253.37,2876.37 R46.2@2253.37,2920.68 ; R46.2@2253.37,2900.46 ccw(c2277.46,2900.46) v1@2260.42,2883.42
RST: C1.2 IC2.29 U1.25 U3.4 | length 2089.7
  Top Layer w7: v1(1611,2205) 1613,2203 1629,2203 ; v1@1619.11,2198.33 cw(c1629,2190.19) 1629,2203 ; v1@1620.84,2208.67 ccw(c1629,2211.71) 1629,2203 ; v1@1955.58,2275.58 ccw(c1937.65,2257.65) 1937.65,2283 ccw(c1937.65,2308.35) v1@1955.58,2290.42 ; v1@1971.32,2289.4 ccw(c1982.3,2297.86) 1982.3,2284 ; v1@1972.23,2278 cw(c1982.3,2272.55) 1982.3,2284 ; IC2.29@2083.36,2111.8 2043.81,2111.8 1995.3,2160.3 1995.3,2271 1982.3,2284 ; 1629,2203 1709,2283 v1(1963,2283) v1@1964,2284 ; v1@1964,2284 1963,2284 1964,2285 1965,2285 v1@1964,2284 ; v1@1964,2284 1982.3,2284
  Top Layer w10: v1@1119.46,2151.9 cw(c1110.61,2140.56) 1125,2140.56 ; v1@1124.01,2159.1 ccw(c1157.48,2155.67) 1133.69,2131.87 ; v1(1125,2159) 1125,2140.56 ; v1@1130.54,2151.9 ccw(c1139.39,2140.56) 1125,2140.56 ; v1@1133.95,2158.08 ccw(c1184.46,2152.9) 1148.56,2117 ; U1.25@1148.56,2040 1148.56,2117 ; 1125,2140.56 1148.56,2117
  Bottom Layer w7: C1.2@1886.05,2319.86 cw(c1886.05,2255.88) 1931.29,2301.12 ; C1.2@1886.05,2326.86 cw(c1886.05,2279.78) 1919.34,2313.07 ; C1.2@1886.05,2333.86 cw(c1886.05,2303.68) C1.2@1907.39,2325.02 ; C1.2@1886.05,2346.36 1949.41,2283 v1(1963,2283) ; C1.2@1900.55,2341.36 ccw(c1923.48,2341.36) C1.2@1907.26,2325.14 ; C1.2@1907.55,2341.36 ccw(c1947.38,2341.36) 1919.21,2313.19 ; 1921.87,2310.54 ccw(c1963,2351.66) v1@1963,2293.5 ; 1933.82,2298.59 ccw(c1963,2327.76) v1@1963,2286.5 ; 1945.77,2286.64 ccw(c1963,2303.86) v1@1963,2279.5
  Bottom Layer w10: v1@1125,2150 cw(c1125,2128.27) 1140.36,2143.64 cw(c1155.73,2159) v1@1134,2159 ; v1(1125,2159) 1166,2118 1577,2118 1613,2154 1613,2203 v1(1611,2205) 1615.12,2209.12 U3.4@1615.12,2300 ; v1@1604.64,2198.64 cw(c1584.44,2178.44) 1613,2178.44 ; v1@1604.64,2211.36 ccw(c1579.33,2236.67) 1615.12,2236.67 ; 1613,2188.1 cw(c1627.9,2188.1) v1@1617.36,2198.64
RUN_LED_CPU: R59.1 U1.63 | length 531.9
  Top Layer w10: v1(551,1485) 583,1485 628.39,1439.61 U1.63@843.44,1439.61 ; v1@557.36,1478.64 cw(c572.73,1463.27) 572.73,1485 cw(c572.73,1506.73) v1@557.36,1491.36
  Bottom Layer w10: R59.1@537.49,1542.18 cw(c503.35,1508.04) 551.63,1508.04 cw(c599.91,1508.04) R59.1@565.77,1542.18 ; v1@544.64,1491.36 ccw(c527.75,1508.25) 551.63,1508.25 ; v1(551,1485) 551.63,1485.63 R59.1@551.63,1561.32 ; 551.63,1505.21 ccw(c571.21,1505.21) v1@557.36,1491.36
SHORT_CPU: J6.4 R38.2 U1.49 | length 3156.6
  Top Layer w10: v1@827.64,2734.64 cw(c812.27,2719.27) 834,2719.27 cw(c855.73,2719.27) v1@840.36,2734.64 ; v1@827.64,2747.36 ccw(c812.27,2762.73) 834,2762.73 ccw(c855.73,2762.73) v1@840.36,2747.36 ; U1.49@843.44,1715.2 717,1715.2 686,1746.2 686,1986 828,2128 828,2459 847,2478 847,2689 834,2702 v1(834,2741) 834,2796 847,2809 847,3035.31 879,3067.31 1290.31,3067.31 1338,3115 v5(1338,3193) ; 1314,3556.16 cw(c1438.33,3556.16) J6.4@1350.41,3644.07 ; 1314,3580.3 cw(c1414.18,3580.3) J6.4@1343.34,3651.14 ; 1314,3604.44 cw(c1390.04,3604.44) J6.4@1336.27,3658.21 ; 1314,3628.58 cw(c1365.9,3628.58) J6.4@1329.2,3665.28 ; v5@1327.39,3182.39 cw(c1301.79,3156.79) 1338,3156.79 cw(c1374.21,3156.79) v5@1348.61,3182.39 ; J6.4@1333.07,3661.41 1314,3642.34 1314,3376 v5(1357,3333) ; v5@1342,3333 ccw(c1305.79,3333) 1331.39,3358.61 ccw(c1357,3384.21) v5@1357,3348
  Bottom Layer w10: v5(1338,3193) 1357,3212 v5(1357,3333) ; v5@1346.39,3322.39 cw(c1320.79,3296.79) 1357,3296.79 cw(c1393.21,3296.79) v5@1367.61,3322.39
TD_N: IC2.16 R45.2 U4.2 U6.3 | length 1189.5
  Top Layer w7: 2081.27,2663.27 cw(c2098.19,2646.36) U4.2@2098.19,2670.28 ; 2085.13,2667.13 ccw(c2073.67,2678.59) U4.2@2089.88,2678.59 ; U4.2@2092.31,2672.71 ccw(c2078.12,2658.53) 2078.12,2678.59 ccw(c2078.12,2698.66) U4.2@2092.31,2684.47 ; v1@2092.58,2869.58 cw(c2074.65,2851.65) 2100,2851.65 cw(c2125.35,2851.65) v1@2107.42,2869.58 ; U6.3@2094.34,2829.28 ccw(c2080.67,2842.95) 2100,2842.95 ; U6.3@2097.64,2762.36 cw(c2093.47,2753.8) 2103,2753.8 ; 2100,2840.53 ccw(c2122.91,2840.53) U6.3@2106.71,2824.33 ; 2100,2857.43 ccw(c2139.81,2857.43) U6.3@2111.66,2829.28 ; v1(2100,2877) 2100,2800 U6.3@2103,2797 2103,2753.8 ; U6.3@2108.36,2762.36 ccw(c2112.53,2753.8) 2103,2753.8 ; U4.2@2110,2678.59 U4.2@2096.59,2678.59 ; IC2.16@2299.89,2249.59 2299.89,2427.15 2223.04,2504 2091,2504 2064,2531 2064,2646 U4.2@2096.59,2678.59 ; U4.2@2096.59,2678.59 2075.91,2678.59 2061.5,2693 2061.5,2712.3 2103,2753.8
  Bottom Layer w7: R45.2@2091.15,2896.76 cw(c2081.9,2879.63) v1@2101.37,2879.63 ; v1@2092.58,2884.42 ccw(c2071.34,2905.66) R45.2@2101.37,2905.66 ; v1(2100,2877) 2102,2879 v1@2101.37,2879.63 ; R45.2@2101.37,2899.04 ccw(c2122.04,2899.04) v1@2107.42,2884.42 ; R45.2@2101.37,2920.68 v1@2101.37,2879.63 ; R45.2@2111.59,2896.76 ccw(c2120.84,2879.63) v1@2101.37,2879.63
TD_P: IC2.17 R44.2 U4.3 U6.1 | length 1249.5
  Top Layer w7: U6.1@1994.34,2829.28 ccw(c1971.02,2852.61) 2004,2852.61 ; v1@1996.58,2867.58 cw(c1978.65,2849.65) 2004,2849.65 cw(c2029.35,2849.65) v1@2011.42,2867.58 ; U6.1@1997.64,2762.36 cw(c1993.47,2753.8) 2003,2753.8 ; 2004,2847.78 ccw(c2030.16,2847.78) U6.1@2011.66,2829.28 ; v1(2004,2875) 2004,2798 U6.1@2003,2797 2003,2753.8 ; U4.3@2006.06,2678.59 U4.3@2014.41,2678.59 ; U6.1@2008.36,2762.36 ccw(c2012.53,2753.8) 2003,2753.8 ; U4.3@2017.88,2670.28 cw(c2017.88,2658.58) U4.3@2026.15,2666.85 ; U4.3@2024.69,2673.84 cw(c2033.79,2667.5) 2033.79,2678.59 ; U4.3@2024.69,2683.34 ccw(c2033.79,2689.68) 2033.79,2678.59 ; U4.3@2026.19,2678.59 ccw(c2054.62,2678.59) 2034.51,2658.49 ; IC2.17@2280.21,2249.59 2280.21,2422.8 2216,2487 2083.96,2487 2047,2523.96 2047,2646 U4.3@2014.41,2678.59 ; 2003,2753.8 2044.5,2712.3 2044.5,2689.3 2033.8,2678.59 ; U4.3@2014.41,2678.59 2033.8,2678.59
  Bottom Layer w7: R44.2@1991.69,2897.63 cw(c1977.05,2875) v1(2004,2875) ; R44.2@1995.49,2903.5 cw(c1985.37,2887.86) v1@2004,2887.86 ; v1@1996.58,2882.42 ccw(c1978.65,2900.35) 2004,2900.35 ccw(c2029.35,2900.35) v1@2011.42,2882.42 ; v1@1998.77,2884.1 ccw(c1992.19,2895.54) 2004.93,2892.13 ccw(c2011.26,2890.43) v1@2008.47,2884.5 ; v1@1999.67,2884.56 ccw(c1997.18,2890.05) 2003,2891.61 ccw(c2014.21,2894.61) v1@2008.85,2884.31 ; v1@2003.22,2885.47 ccw(c2002.84,2890.62) 2007.83,2889.29 ccw(c2012.82,2887.95) v1@2009.91,2883.68 ; R44.2@2003.37,2920.68 2004,2920.05 v1(2004,2875) ; v1@2004,2888.64 cw(c2022.78,2888.64) R44.2@2011.83,2903.9 ; R44.2@2015.91,2898.21 ccw(c2032.58,2875) v1(2004,2875)
TM1CH3: U1.102
TM3CH4: U1.47
U1RX: U1.137
U1TX: U1.136
U2RX: U1.122
U2TX: U1.119
UVP_CPU: J6.2 U1.53 | length 2760.3
  Top Layer w10: U1.53@843.44,1636.46 715.54,1636.46 642,1710 642,2002 715,2075 715,2592 726,2603 726,3395.82 727,3396.82 727,3419.18 726,3420.18 726,3562 879,3715 1079.48,3715 J6.2@1133.07,3661.41 ; J6.2@1108.54,3661.41 ccw(c1049.33,3661.41) 1091.2,3703.28 ccw(c1133.07,3745.15) J6.2@1133.07,3685.94 ; J6.2@1118.54,3661.41 ccw(c1083.47,3661.41) 1108.27,3686.21 ccw(c1133.07,3711.01) J6.2@1133.07,3675.94
V_SAMPLING: J6.9 R37.1 | length 277.7
  Top Layer w20: R37.1@1775.85,3545.85 1833.07,3603.07 J6.9@1833.07,3661.41 ; R37.1@1775.85,3558.36 ccw(c1775.85,3588.58) R37.1@1797.21,3567.21 ; R37.1@1790.85,3543.36 cw(c1833.05,3543.36) 1803.21,3573.21 ; J6.9@1819.26,3647.6 cw(c1785.93,3614.27) 1833.07,3614.27 cw(c1880.21,3614.27) J6.9@1846.88,3647.6
  Top Layer w50: R37.1@1775.85,3538.36 R37.1@1775.85,3545.85
V_SAMPLING_U: C23.2 C76.2 D13.K R37.2 | length 4657.4
  Top Layer w10: v2(455,1791) 533,1869 533,2146 642,2255 642,2600 v1(689,2647) ; v2@455,1801 ccw(c455,1825.14) 472.07,1808.07 ccw(c489.14,1791) v2@465,1791 ; v1@680,2647 cw(c658.27,2647) 673.64,2631.64 cw(c689,2616.27) v1@689,2638
  Top Layer w15: C23.2@1857.58,3420.99 cw(c1827.7,3391.11) 1869.95,3391.11 cw(c1912.2,3391.11) C23.2@1882.33,3420.99 ; C23.2@1869.95,3438.36 1869.95,3247.05 ; v5@1882.54,3212.97 ccw(c1839.26,3216.35) 1869.95,3247.05 ; v5(1895,3212) 1896,3213 1896,3221 1869.95,3247.05
  Top Layer w20: R37.2@1775.85,3438.36 C23.2@1869.95,3438.36 ; R37.2@1786.45,3427.75 cw(c1812.06,3402.15) 1812.06,3438.36 cw(c1812.06,3474.57) R37.2@1786.45,3448.97 ; C23.2@1859.35,3427.75 ccw(c1833.74,3402.15) 1833.74,3438.36 ccw(c1833.74,3474.57) C23.2@1859.35,3448.97
  Bottom Layer w10: C76.2@319.09,720.97 ccw(c308.94,730.94) 319,741 ; 326.14,733.86 cw(c316.14,723.87) C76.2@326.23,713.96 ; C76.2@338.36,706.95 338.36,721.64 319,741 ; v2@447.93,1783.93 cw(c430.86,1766.86) 455,1766.86 cw(c479.14,1766.86) v2@462.07,1783.93 ; v2(455,1791) 455,1299 319,1163 319,741 ; v1(689,2647) 716,2674 716,2776 992,3052 1835.99,3052 1886.5,3102.5 ; v1@689,2656 ccw(c689,2677.73) 704.36,2662.36 ccw(c719.73,2647) v1@698,2647 ; D13.K@1876.13,3116.94 cw(c1871.27,3102.51) 1886.5,3102.51 ; D13.K@1886.5,3147.74 1886.5,3102.5 ; D13.K@1896.87,3116.94 ccw(c1901.73,3102.51) 1886.5,3102.51
  Bottom Layer w15: D13.K@1877.78,3168.95 ccw(c1836.22,3210.52) v5@1895,3210.52 ; v5@1884.17,3205.75 cw(c1856.91,3190.01) D13.K@1887.32,3181.86 ; v5@1886.16,3203.16 cw(c1864.82,3181.82) 1895,3181.82 cw(c1925.18,3181.82) v5@1903.84,3203.16 ; D13.K@1886.5,3147.74 1895,3156.24 v5(1895,3212) ccw(c1942.73,3212) D13.K@1915.87,3172.54 ; D13.K@1887.8,3183.65 cw(c1915.68,3176.17) v5@1901.25,3201.17 ; v5@1890.45,3200.36 cw(c1883.85,3183.43) 1901.39,3188.14 cw(c1918.94,3192.84) v5@1904.76,3204.19
VOL_DOWN: U1.60
VOL_UP: U1.64
pads on no net: IC2.1 IC2.5 IC2.6 IC2.8 IC2.9 IC2.10 IC2.11 IC2.12 IC2.25 IC2.26 IC2.33 IC2.38 IC2.42 IC2.45 IC2.46 J2.19 R4.6 R17.4 R17.5 R26.7 R26.8 Re1.2 Re1.3 Re1.4 Re1.7 T4.4 T5.4 U1.2 U1.3 U1.4 U1.5 U1.7 U1.8 U1.9 U1.12 U1.15 U1.18 U1.19 U1.20 U1.21 U1.22 U1.26 U1.28 U1.29 U1.34 U1.42 U1.46 U1.65 U1.69 U1.70 U1.75 U1.77 U1.78 U1.79 U1.80 U1.81 U1.82 U1.85 U1.86 U1.87 U1.88 U1.89 U1.90 U1.91 U1.92 U1.93 U1.96 U1.97 U1.98 U1.101 U1.123 U1.124 U1.125 U1.127 U1.132 U1.135 U1.141 U1.142 U1.143 U2.4 U2.5 U4.4 U5.2 U5.4 U5.6 U5.8 U5.9 U5.17 U5.18 U5.19 U5.22 U5.28 U6.4 U6.5 U6.12 U6.13 U8.4 Y1.1 Y2.1

## Polygon pours and split planes (outlines as drawn)
AGND1 on Bottom Layer "Bottom Layer-No Net" (solid, remove dead copper, pour order 4): 79,432 344,167 522,167 1663,167 1759,263 1761,265 1761,471 1761,1033 1820,1092 3266,1092 3275,1092 3323,1140 3323,1239 3323,2602 3298,2627 2847,2627 2626,2627 2610,2643 2605,2648 2605,2764 2599,2770 2094,2770 209,2770 79,2640 74,2635 74,436
AGND1 on Top Layer "Bottom Layer-No Net" (solid, remove dead copper, pour order 2): 136,2691 84,2639 84,2604 84,414 193,305 332,166 552,166 1688,166 1756,234 1759,237 1759,428 1759,1032 1807,1080 1821,1094 2094,1094 3275,1094 3307,1126 3319,1138 3319,1255 3319,2605 3314,2610 3298,2626 3175,2626 2638,2626 2601,2663 2600,2664 2600,2768 1522,2768 1521,2769 1514,2762 406,2762 204,2762 132,2690
no net on GND (split plane): 3365.73,3363.85 3361.23,3364.74 3356,3365.09 3184.6,3365.09 3094.09,3455.6 3094.09,3749 3093.74,3754.23 3092.72,3759.38 3092.7,3759.43 3365.73,3759.43
no net on GND (split plane): 3015.28,3759.38 3014.26,3754.23 3013.91,3749 3013.91,3439 3014.26,3433.77 3015.28,3428.63 3016.97,3423.66 3019.28,3418.96 3022.2,3414.6 3025.66,3410.66 3139.66,3296.66 3143.6,3293.2 3147.96,3290.28 3152.66,3287.97 3157.63,3286.28 3162.77,3285.26 3168,3284.91 3356,3284.91 3361.23,3285.26 3365.73,3286.15 3365.73,2702.05 3363.76,2700.07 2636.07,2700.07 2636.07,3004 2635.78,3006.94 2634.93,3009.77 2633.53,3012.37 2631.66,3014.66 2628.66,3017.66 2626.37,3019.53 2623.77,3020.93 2620.94,3021.78 2618,3022.07 2615.06,3021.78 2612.72,3021.07 2002.07,3021.07 2002.07,3329 2002.07,3759.43 3015.3,3759.43
AGND1 on GND (split plane): 1971.93,3329 1971.93,3318 1971.93,3014 1972.22,3011.06 1973.07,3008.23 1974.47,3005.63 1976.34,3003.34 1984.34,2995.34 1986.63,2993.47 1989.23,2992.07 1992.06,2991.22 1995,2990.93 2605.93,2990.93 2605.93,2685 2606.22,2682.06 2607.07,2679.23 2608.47,2676.63 2610.34,2674.34 2612.63,2672.47 2615.23,2671.07 2618.06,2670.22 2621,2669.93 3365.73,2669.93 3365.73,939.09 2654,939.09 2649.29,938.72 2644.7,937.62 2642.15,936.56 2640.34,935.81 2636.31,933.35 2632.72,930.28 2459.72,757.28 2456.65,753.69 2454.19,749.66 2453.66,748.38 2452.38,745.3 2451.28,740.71 2450.91,736 2450.91,564.46 2271.72,385.28 2268.65,381.69 2266.19,377.66 2265.66,376.38 2264.38,373.3 2263.28,368.71 2262.91,364 2262.91,93.46 2201.72,32.28 2198.65,28.69 2196.19,24.66 2194.38,20.3 2194.33,20.1 257.22,20.1 228.07,49.24 228.07,107 227.78,109.94 227.27,111.63 227.52,118.11 227.19,126.69 226.18,135.23 224.5,143.65 222.17,151.92 219.2,159.98 215.6,167.78 211.4,175.28 206.63,182.42 201.31,189.17 195.48,195.48 189.17,201.31 182.42,206.63 175.28,211.4 167.78,215.6 159.98,219.2 151.92,222.17 143.65,224.5 135.23,226.18 133.87,226.34 132.77,226.93 129.94,227.78 127,228.07 65.24,228.07 20.1,273.22 20.1,3522.31 49.24,3551.45 107,3551.45 109.94,3551.74 111.63,3552.26 118.11,3552 126.69,3552.34 135.23,3553.35 143.65,3555.03 151.92,3557.36 159.98,3560.33 167.78,3563.93 175.28,3568.13 182.42,3572.9 189.17,3578.22 195.48,3584.05 201.31,3590.36 206.63,3597.11 211.4,3604.25 215.6,3611.74 219.2,3619.55 222.17,3627.61 224.5,3635.88 226.18,3644.3 226.34,3645.66 226.93,3646.76 227.78,3649.59 228.07,3652.53 228.07,3714.28 273.22,3759.43 1971.93,3759.43
no net on VDD (split plane): 3365.73,3362.45 3364.23,3362.74 3359,3363.09 3186.6,3363.09 3096.09,3453.6 3096.09,3755 3095.8,3759.43 3365.73,3759.43
no net on VDD (split plane): 2377.93,3069.07 1977.24,3069.07 1963.07,3083.24 1963.07,3286.9 2377.93,3286.9
V_SAMPLING on VDD (split plane): 2312.9,20.1 2311.41,20.1 2312.9,21.59
DC+24V on VDD (split plane): 3013.91,3757 3014.26,3751.77 3015.28,3746.63 3015.91,3744.76 3015.91,3437 3016.26,3431.77 3017.28,3426.63 3018.97,3421.66 3021.28,3416.96 3024.2,3412.6 3027.66,3408.66 3141.66,3294.66 3145.6,3291.2 3149.96,3288.28 3154.66,3285.97 3159.63,3284.28 3164.77,3283.26 3170,3282.91 3359,3282.91 3364.23,3283.26 3365.73,3283.55 3365.73,2587.1 2715.32,2587.1 2641.1,2661.32 2641.1,3094 2641.1,3247 2640.71,3250.92 2639.57,3254.69 2637.71,3258.17 2635.21,3261.21 2575.21,3321.21 2572.17,3323.71 2568.69,3325.57 2564.92,3326.71 2561,3327.1 1955.32,3327.1 1953.77,3327.93 1950.94,3328.78 1948,3329.07 1945.06,3328.78 1942.23,3327.93 1940.68,3327.1 1069.32,3327.1 1034.21,3362.21 1031.17,3364.71 1027.69,3366.57 1023.92,3367.71 1020,3368.1 1017,3367.8 1014,3368.1 551.32,3368.1 396.1,3523.32 396.1,3759.43 3014.07,3759.43
DC+3.3V on VDD (split plane): 186 vertices, not listed, extent 20.1,20.1 3365.73,3759.43

## Keep-outs
Keep-Out Layer:
  the board outline again, w20